# Altium PCB LMV324收发一体-20260920.PcbDoc
Units mil, origin at the board's own origin, x right, y up, seen from the top; angles counter-clockwise.
Board outline 358.27 x 1118.11 mil, 2 copper layers (Top, Bottom), stack 12.7 mil thick; 61 components, 38 nets, 157 pads, 62 vias.
Unrouted connection lines stored in the file: 1.
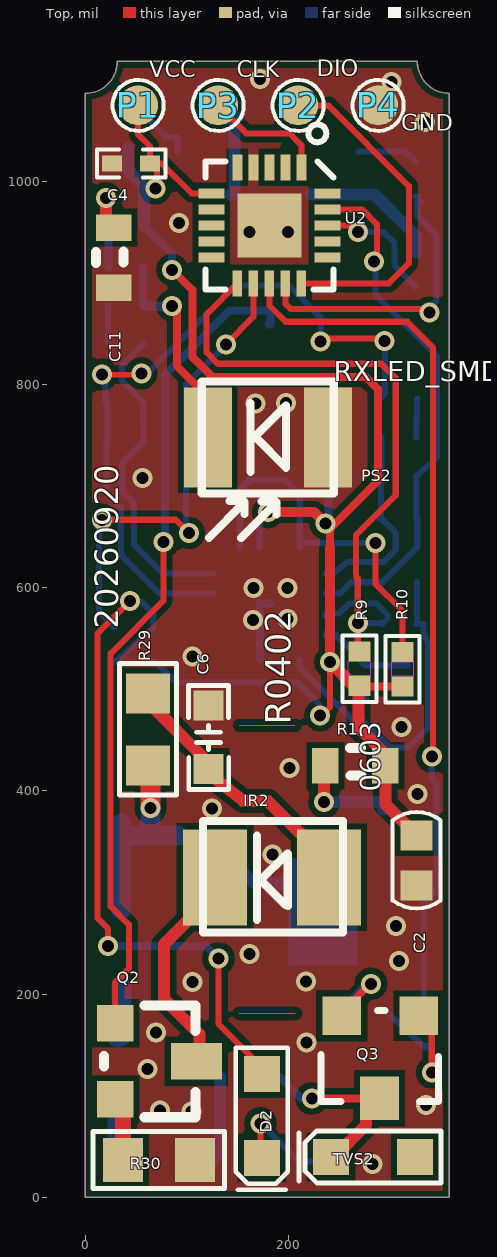
[diagram p0: Top view]
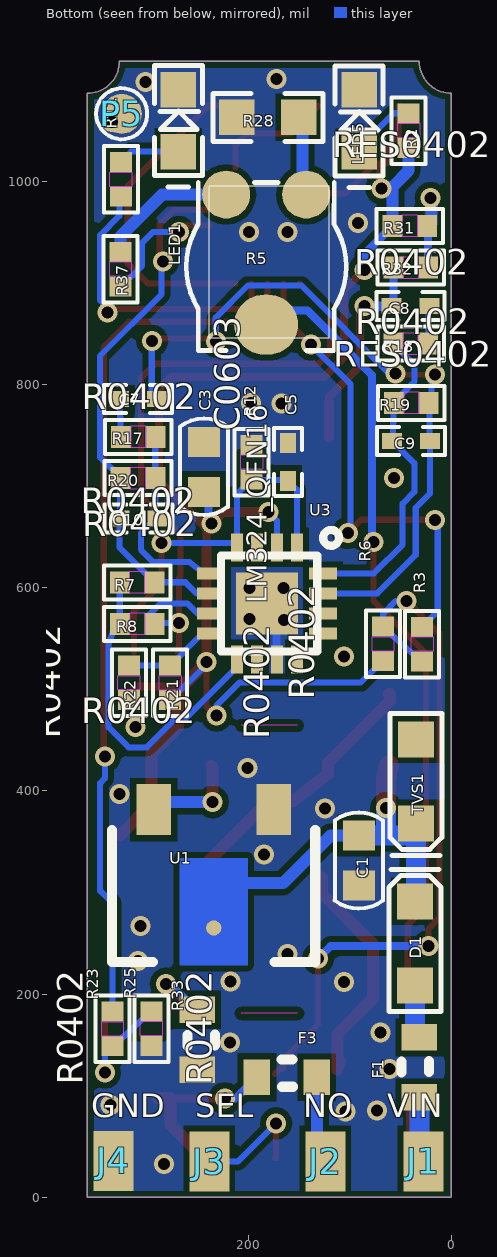
[diagram p1: Bottom view, seen from below]

## Layer stack, top to bottom
Solder Mask Top: solder mask 0.4, Solder Resist, Dk 3.5
Top: signal copper 1.35
Dielectric 1: dielectric 10, FR-4, Dk 4.3
Bottom: signal copper 1.35
Solder Mask Bottom: solder mask 0.4, Solder Resist, Dk 3.5

## Board outline
358.27,0 0,0 0,1086.61 ccw(c0,1118.11) 31.5,1118.11 326.77,1118.11 ccw(c358.27,1118.11) 358.27,1086.61

## Design rules (kind name [scope] priority, off if disabled: settings)
Clearance "Clearance - Default - DEFAULT- SMD" [IsVia vs IsSMTPin] p1: gap=6 ignorepadtopadclearanceinfootprint=FALSE
Clearance "Clearance - Default - DEFAULT - Via" [IsVia vs IsVia] p2: gap=6 ignorepadtopadclearanceinfootprint=FALSE
Clearance "Clearance - Default - DEFAULT - Net" [All] p3: gap=6 ignorepadtopadclearanceinfootprint=FALSE except(0: Arc-Hole Track-Hole SMDPad-Hole THPad-Hole Via-Hole Fill-Hole Poly-Hole Region-Hole Text-Hole; 10: Text-Text)
ComponentClearance "ComponentClearance - Default - DEFAULT" [All] p1: gap=6 collisioncheckmode=3 verticalgap=10 showdistances=FALSE
FanoutControl Fanout_Small [(CompPinCount < 5)] p3: bgadir=Out bgaviamode=Centered fanoutstyle=Auto fanoutdirection=OutThenIn viagrid=1 // Fanout_Small (Default Rule)
FanoutControl Fanout_SOIC [IsSOIC] p4: bgadir=Out bgaviamode=Centered fanoutstyle=Auto fanoutdirection=Alternating viagrid=1 // Fanout_SOIC (Default Rule)
HoleToHoleClearance "HoleToHoleClearance - Default - DEFAULT" [All] p1: gap=6 allowstackedmicrovias=TRUE
Length "Default Length" [All] p1: maxlimit=50000 minlimit=0
MaxMinImpedance "Default Impedance" [All] p1: minimum=50.00 maximum=150.0
ParallelSegment "Default Parallel Segment Adjasent" [All] p1: limit=1000 gap=200
ParallelSegment "Default Parallel Segment Same Layer" [All] p2: limit=1000 gap=200
PlaneConnect "Default PlaneConnect" [All] p1: planeconnectstyle=Direct reliefexpansion=20 reliefentries=4 reliefconductorwidth=15 reliefairgap=10
PolygonConnect "PolygonConnect - Default SMT" [IsSMTPin] p1: connectstyle=Direct reliefconductorwidth=10 reliefentries=4 polygonreliefangle="45 Angle" airgapwidth=10
PolygonConnect "PolygonConnect - Default Pad" [All] p2: connectstyle=Direct reliefconductorwidth=15 reliefentries=4 polygonreliefangle="45 Angle" airgapwidth=10
RoutingLayers "RoutingLayers - Default - DEFAULT" [All] p1: top layer_v5=TRUE bottom layer_v5=TRUE
RoutingPriority "RoutingPriority - Default - DEFAULT" [All] p1: routingpriority=3
RoutingTopology "Default Routing Topology" [All] p1: topology=Shortest
RoutingVias "RoutingVias - Default - DEFAULT" [All] p1: holewidth=11.81 width=19.68 viastyle="Through Hole" minholewidth=11.81 minwidth=19.68 maxholewidth=11.81 maxwidth=19.68
SMDToCorner "SMDToCorner - Default - DEFAULT" [All] p1: distance=60000
SolderMaskExpansion [All] p1: expansion=4 istentingtop=FALSE
Width "Default Width" [All] p1: maxlimit=6 minlimit=6 preferedwidth=6
22 further rules are at their usual default settings.

## Components (designator, comment, footprint, x,y, rotation, side; value= is the part's Value field where it differs from the comment)
C1 "C0603" C0603 91.13,331.55 r270 bottom
C2 "C0603" C0603 326.03,331.75 r270 top
C3 "C0603" C0603 243.66,719.03 r90 bottom
C4 "CC0402" CC0402 80.88,1032.85 r180 top
C5 "CAA0402" CAA0402 145.27,688.1 r90 bottom
C6 "0603C" 0603C 121.23,452.76 r270 top
C7 "CC0402" CC0402 344.14,770.3 r180 bottom
C8 "CC0402" CC0402 4.59,892.74 r0 bottom
C9 "CC0402" CC0402 75.44,729.23 r180 bottom
C10 "CC0402" CC0402 343.84,652.79 r180 bottom
C11 "0603" 0603 28.03,895.44 r180 top
D1 "WSOD-323" WSOD-323 35.8,250 r270 bottom
D2 "WSOD-323" WSOD-323 173.68,80.23 r90 top
F1 "0603" 0603 31.5,98.43 r0 bottom
F3 "0603" 0603 191.44,118.29 r90 bottom
IR2 "TXLED_SMD" TXLED_SMD 244.09,314.96 r270 top
J1 "FPAD_3C" FPAD_3C 27.56,35.43 r90 bottom
J2 "FPAD_3C" FPAD_3C 124.02,35.43 r90 bottom
J3 "FPAD_3C" FPAD_3C 238.19,35.43 r90 bottom
J4 "FPAD_3C" FPAD_3C 332.68,35.83 r90 bottom
LED1 "LED0603" LED0603 243.7,1004.33 r90 bottom
LED5 "LED0603" LED0603 65.75,1003.94 r90 bottom
P1 "TEST-POINT_D1.0" TEST-POINT_D1.0 51.97,1074.8 r0 top
P2 "TEST-POINT_D1.0" TEST-POINT_D1.0 209.45,1074.8 r0 top
P3 "TEST-POINT_D1.0" TEST-POINT_D1.0 130.71,1074.8 r0 top
P4 "TEST-POINT_D1.0" TEST-POINT_D1.0 288.19,1074.8 r0 top
P5 "TEST-POINT_D1.0" TEST-POINT_D1.0 324.41,1066.54 r180 bottom
PS2 "RXLED_SMD" RXLED_SMD 179.53,748.03 r180 top
Q2 "SOT23" SOT23 68.37,133.86 r270 top
Q3 "SOT23$2F$2" SOT23$2F$2 329.53,178.74 r0 top
R1 "0603" 0603 236.22,424.78 r90 top
R2 "R0402" R0402 42.1,1050 r90 bottom
R3 "R0402" R0402 28.73,544.6 r270 bottom
R5 "SMD" SMD 182.28,916.14 r0 bottom
R6 "R0402" R0402 67.25,544.87 r270 bottom
R7 "R0402" R0402 309.36,605.41 r0 bottom
R8 "R0402" R0402 309.17,564.38 r180 bottom
R9 "R0402" R0402 269.7,520.46 r270 top
R10 "R0402" R0402 312.18,519.91 r270 top
R11 "R0402" R0402 325.2,1001.97 r90 bottom
R12 "R0402" R0402 196.5,723.68 r90 bottom
R17 "R0402" R0402 308.05,748.43 r180 bottom
R18 "R0402" R0402 40.07,840.31 r0 bottom
R19 "R0402" R0402 39.34,782.03 r0 bottom
R20 "R0402" R0402 308.41,707.91 r0 bottom
R21 "R0402" R0402 276.73,506.35 r90 bottom
R22 "R0402" R0402 317.37,506.54 r270 bottom
R23 "R0402" R0402 333.46,165.75 r90 bottom
R25 "R0402" R0402 295.28,166.14 r270 bottom
R28 "R0603" R0603 150,1062.99 r0 bottom
R29 "R0805" R0805 61.42,425.2 r90 top
R30 "R0805" R0805 107.87,36.61 r180 top
R31 "RES0402" RES0402 40.86,956.15 r0 bottom
R32 "RES0402" RES0402 39.76,915.1 r180 bottom
R33 "0603" 0603 250.23,184.69 r180 bottom
R37 "RES0402" RES0402 325.71,913.63 r270 bottom
TVS1 "SOD-323" SOD-323 34.94,409.45 r90 bottom
TVS2 "SOD-323" SOD-323 283.07,39.76 r0 top
U1 "SOT89" SOT89 233.89,301.67 r0 bottom
U2 "MG32F003_QFN20" MG32F003_QFN20 181.1,956.69 r270 top
U3 "LM324_QFN16" LM324_QFN16 181.5,584.65 r270 bottom

## Footprints (in the part's own frame and the unit in brackets; to place one, negate y for a bottom-side part, rotate by r counter-clockwise, add the part's x,y. Pads: shape width x height; smd on the part's side, far side on the other; paste and mask are expansions set on the pad)
0603 [mil]
  rect 35x26 smd: 1(0,0) 2(0,-59)
  silkscreen extent -9,-36 18,-24
0603C [mm]
  rect 0.75x0.75 smd: 1(-0.791,-0.004) 2(0.791,0.004)
  round 0 all layers, no hole: $$$1(0,0)
  silkscreen extent -1.3,-0.5 1.3,0.5
C0603 [mm]
  rect 0.75x0.8 smd: 1(-0.625,0) 2(0.625,0)
  silkscreen extent -1.21,-0.6 1.21,0.6
CAA0402 [mm]
  rect 0.5x0.4 smd: 1(0.435,0.391) 2(1.385,0.391)
  silkscreen extent 0.06,0.04 1.76,0.74
CC0402 [mm]
  rect 0.5x0.4 smd: 1(0.435,0.391) 2(1.385,0.391)
  silkscreen extent 0.06,0.04 1.76,0.74
FPAD_3C [mm]
  rect 1.5x1 smd: 1(0,0)
LED0603 [mil]
  rect 35x35 smd: 1(25,25) 2(86.02,25)
  silkscreen extent -10,1 110,49
LM324_QFN16 [mm]
  rect 0.7x0.3 smd: 1(-1.4,0.75) 2(-1.4,0.25) 3(-1.4,-0.25) 4(-1.4,-0.75) 9(1.4,-0.75) 10(1.4,-0.25) 11(1.4,0.25) 12(1.4,0.75)
  rect 0.3x0.7 smd: 5(-0.75,-1.4) 6(-0.25,-1.4) 7(0.25,-1.4) 8(0.75,-1.4) 13(0.75,1.4) 14(0.25,1.4) 15(-0.25,1.4) 16(-0.75,1.4)
  rrect0% 1.55x1.55 smd: 17(0,0)
  silkscreen extent -1.84,-1.15 1.21,1.8
MG32F003_QFN20 [mm]
  rect 0.65x0.25 smd: 1(-1.45,0.8) 2(-1.45,0.4) 3(-1.45,0) 4(-1.45,-0.4) 5(-1.45,-0.8)
  rect 0.25x0.65 smd: 6(-0.8,-1.45) 7(-0.4,-1.45) 8(0,-1.45) 9(0.4,-1.45) 10(0.8,-1.45) 16(0.8,1.45) 17(0.4,1.45) 18(0,1.45) 19(-0.4,1.45) 20(-0.8,1.45)
  rect 0.65x0.24 smd: 11(1.45,-0.8) 12(1.45,-0.4) 13(1.45,0) 14(1.45,0.4) 15(1.45,0.8)
  rrect0% 1.6x1.6 smd: 21(0,0)
  silkscreen extent -2.52,-1.6 1.6,1.6
R0402 [mm]
  rect 0.5x0.55 smd: 1(-0.432,0) 2(0.432,0)
  Top keep-out region: -0.18,0.274 0.182,0.274 0.182,-0.273 -0.18,-0.273 -0.18,0.274
  silkscreen extent -0.83,-0.43 0.83,0.43
R0603 [mil]
  rect 35x35 smd: 1(0,0) 2(61.02,0)
  silkscreen extent -24,-24 85,24
R0805 [mm]
  rect 1x1.1 smd: 1(0,0) 2(1.8,0)
  silkscreen extent -0.74,-0.72 2.55,0.71
RES0402 [mm]
  rect 0.5x0.55 smd: 1(-0.432,0) 2(0.432,0)
  Top keep-out region: -0.18,0.274 0.182,0.274 0.182,-0.273 -0.18,-0.273 -0.18,0.274
  silkscreen extent -0.83,-0.43 0.83,0.43
RXLED_SMD [mm]
  rect 1.2x2.5 smd: 1(-1.5,0) 2(1.5,0)
  silkscreen extent -1.65,-1.4 1.65,2.52
SMD [mm]
  round 1.2 smd: 1(-1,-1.8) 3(1,-1.8)
  oval 1.6x1.5 smd: 2(0,1.45)
  round 0 all layers, no hole: $$$1(0,0)
  silkscreen extent -2,-2.1 2,2.1
SOD-323 [mm]
  round 0 all layers, no hole: 1(0,0)
  rect 0.9x0.9 smd: 2(-1.05,0) 3(1.05,0)
  silkscreen extent -1.85,-0.65 1.7,0.65
SOT23 [mil]
  rect 36x36 smd: 1(-37.5,-39) 2(37.5,-39)
  rect 36x50 smd: 3(0,41)
  silkscreen extent -55,-50 55,40
SOT23$2F$2 [mil]
  rect 38x38 smd: 1(-1.5,0) 2(-77.2,0)
  rect 38x43 smd: 3(-40,-81.1)
  silkscreen extent -98,-84 18,5
SOT89 [mil]
  rect 34x50 smd: 1(-59,-80) 3(59,-80)
  round 15 smd: 2(0,36.5)
  Top region: -17,-31.89 -17,-32 -33.5,-32 -33.5,73 33.5,73 33.5,-32 17,-32 17,-31.89 -17,-31.89
  silkscreen extent -100,-60 100,70
TEST-POINT_D1.0 [mm]
  round 1 smd: 1(0,0)
  silkscreen extent -0.64,-0.64 0.64,0.64
TXLED_SMD [mm]
  rect 2.4x1.6 smd: 1(0,-0.11) 2(0,-2.96)
  silkscreen extent -1.41,-3.26 1.38,0.24
WSOD-323 [mm]
  rect 0.9x0.9 smd: 1(1.05,0) 2(-1.05,0)
  round 0 all layers, no hole: $$$1(0,0)
  silkscreen extent -1.85,-0.65 1.7,0.65

## Via types
v1: diameter 19.68, hole 11.81, Top to Bottom, 62 vias

## Nets (pads, with @x,y where several pads share a name; then routed paths per layer and width w, separated by ;. In a path a pad name is that pad's centre, name@x,y a point inside that pad or via, vN(x,y) a via of type N, cw(c..) or ccw(c..) an arc to the next point about the centre after c; other vN are vias at no path point)
$$$1: C8.1 R18.1 | length 38.4
  Bottom w6: C8.1 22.4,877.34 22.4,840.31 R18.1
$$$2: C7.1 R17.1 | length 38.9
  Bottom w6: R17.1 325.74,748.43 325.74,768.25 326.32,768.83 326.32,785.71 C7.1
$$$3: R5.3 R37.1 | length 136.4
  Bottom w11.81: R5.3 284.65,987.01 325.71,945.94 R37.1
$$$7: Q2.2 R30.2 | length 62.9
  Top w15.75: Q2.2 37.01,88.72 R30.2
$$$9: IR2.2 Q2.3 | length 232.7
  Top w11.81: Q2.3 112.2,125.98 112.2,160.63 77.17,195.67 77.17,248.82 127.56,299.21 IR2.2
$$$12: Q3.1 R23.1 R25.1 | length 156.8
  Top w6: Q3.1 340.94,178.74 v1(340.94,122.83)
  Bottom w6: R25.1 295.66,183.14 334.4,147.54 R23.1 340.94,148.75 v1(340.94,122.83)
$$$14: F3.1 Q3.3 TVS2.2 | length 233.3
  Top w6: TVS2.2 TVS2.2@246.26,39.76 ; Q3.3@273.53,79.14 273.53,97.64 Q3.3
  Top w7.87: v1(222.83,97.24) 289.53,97.24 Q3.3
  Top w11.81: TVS2.2 244.67,39.76 276.43,71.53 276.43,97.64 Q3.3
  Bottom w7.87: F3.1 212.49,97.24 v1(222.83,97.24)
$$$18: LED5.1 R2.2 | length 74
  Bottom w6: R2.2 56.69,1067 78.35,1045.35 78.35,1043.44 90.75,1043.44 LED5.1
$$$3960: Q2.1 R5.2 | length 828.4
  Top w6: Q2.1 29.37,211.65 42.91,225.2 42.91,268.3 24.8,286.41 24.8,535.04 76.77,587.01 v1(76.77,644.88)
  Bottom w7.87: v1(76.77,644.88) 78.35,640.16 78.35,809.45 141.73,872.83 182.28,872.83 R5.2 R5.2@180.31,859.06
$$$4871: D1.1 F1.2 | length 54.3
  Bottom w19.68: F1.2 35.8,158.97 D1.1
$$$4957: LED1.1 R11.2 | length 62.7
  Bottom w6: LED1.1 315.16,1029.33 325.98,1018.5 R11.2
$$$12813: C11.2 R31.1 R32.2 | length 109.8
  Top w11.81: v1(20.47,983.46) 20.47,954.44 C11.2
  Bottom w7.87: R32.2 22.76,956.15 R31.1
  Bottom w11.81: v1(20.47,983.46) 19.69,983.92 19.69,958.58 R31.1
$$$30448: R5.1 R28.1 | length 83.1
  Bottom w11.81: R5.1 146.55,987.01 146.55,1062.99 R28.1
$$$30618: Q3.2 R33.1 | length 86.6
  Top w7.87: Q3.2 250.79,180.28 250.79,180.68 280.34,210.24 v1(281.1,210.24)
  Bottom w6: R33.1 275.77,210.24 v1(281.1,210.24)
$$$31476: R1.1 U1.3 | length 101.5
  Top w11.81: v1(235.04,388.98) 235.04,423.6 R1.1
  Bottom w11.81: v1(235.04,388.98) 292.89,388.98 U1.3
$$$31637: C6.2 IR2.1 R29.2 | length 275.2
  Top w11.81: R29.2 60.63,495.28 60.63,488.58 121.38,427.83 C6.2@121.38,418.76 ; C6.2 C6.2@121.38,418.76 ; IR2.1 239.76,330.01 179.62,390.16 155.37,390.16 121.38,416.85 C6.2@121.38,418.76
$$$31695: D2.1 R3.2 R6.1 | length 698.5
  Top w6: v1(22.44,247.24) 22.44,264.22 11.81,275.24 11.81,554.72 v1(44.09,587.01) ; v1(131.1,235.04) 131.1,170.47 165.16,136.42 165.16,126.77 168.47,126.77 D2.1
  Bottom w6: R3.2 28.95,527.6 28.95,526.76 67.02,561.03 67.02,561.87 R6.1 67.25,574.43 54.67,587.01 v1(44.09,587.01)
  Bottom w7.87: v1(22.44,247.24) 118.9,247.24 v1(131.1,235.04)
GND: C1.2 C2.2 C3.2 C4.2 C5.2 C6.1 C11.1 J4.1 LED1.2 LED5.2 P4.1 P5.1 PS2.1 R12.2 R22.2 R25.2 R28.2 R30.1 R33.2 TVS1.1 TVS2.1 U1.1 U2.4 U2.21 U3.11 U3.17 | length 64.6
  Bottom w7.87: U3.11 172.05,539.37 172.05,584.65 U3.17
  other v1: 282.68,32.68 104.33,84.65 73.23,85.43 335.43,90.94 61.02,126.38 217.72,152.36 69.69,162.2 105.51,212.2 217.32,212.6 308.66,232.68 161.42,239.76 305.91,267.32 184.25,337.4 124.41,382.68 326.77,397.24 200.79,422.83 311.02,462.99 105.51,532.28 164.96,568.11 198.82,569.29 165.35,599.61 198.82,599.61 56.3,708.27 167.32,781.5 197.24,781.89 199.21,950 161.42,950.39 92.13,959.06 334.25,1058.27 301.18,1098.03 172.05,1100.79
IN1-: C9.1 R18.2 R19.2 U3.16 | length 320.5
  Bottom w6: R18.2 57.07,839.95 36.22,819.1 36.22,803.14 56.34,783.01 R19.2 56.97,782.03 56.97,762.12 57.28,761.81 57.37,761.81 57.37,744.63 C9.1 36.35,722.69 36.35,694.43 48.03,682.75 48.03,642.52 76.38,614.17 U3.16
IN2+: C5.1 R10.1 R12.1 U3.1 U3.4 | length 376.3
  Top w6: v1(285.43,644.09) 285.43,603.88 312.18,577.13 R10.1
  Bottom w6: U3.1 151.97,696.54 C5.1 160.67,705.96 196.5,705.96 R12.1 211.02,692.16 U3.4 211.02,644.09 v1(285.43,644.09)
IN2-: C10.2 R17.2 R20.1 U3.5 | length 199
  Bottom w6: U3.5 243.63,614.17 257.96,625.24 293.22,625.24 305.5,637.52 305.5,653.96 291.27,668.19 C10.2 291.18,668.19 291.18,707.91 R20.1 291.41,748.43 R17.2
IN3+: R7.2 R8.1 U3.9 | length 325.6
  Bottom w6: U3.9 211.02,521.65 262.2,470.47 272.05,470.47 299.61,442.91 317.72,442.91 337.4,462.6 337.4,544.49 333.01,556.55 333.01,564.38 R8.1 326.36,564.38 R7.2
IN3-: R21.2 R22.1 U3.8 | length 118.3
  Bottom w6: U3.8@239.37,552.36 236.61,552.36 U3.8 ; U3.8@244.56,555.12 U3.8 ; R21.2@268.91,530.19 275.59,523.35 R21.2 ; R22.1 276.73,523.54 R21.2 ; U3.8 244.96,555.12 R21.2
IO_OUTPUT_NC: R3.1 U2.12 | length 482.1
  Top w6: v1(16.14,666.93) 88.98,666.93 v1(101.97,653.94) ; v1(138.19,839.37) 165.35,866.54 U2.12
  Bottom w6: v1(16.14,666.93) 16.73,666.34 13.39,662.99 13.39,576.94 R3.1 R3.1@26.94,561.6 ; v1(101.97,653.94) 99.21,653.94 99.21,800.39 v1(138.19,839.37)
IO_OUTPUT_NO: R23.2 U2.13 | length 864.1
  Top w6: U2.13 181.1,877.81 197.1,861.81 316.93,861.81 342.13,836.61 342.13,433.86 v1(340.94,433.86)
  Bottom w6: R23.2 333.46,289.44 345.67,301.64 345.67,407.64 340.94,412.37 v1(340.94,433.86) 341.34,433.46 v1@341.34,431.89
OUT1: C7.2 C9.2 R19.1 U3.15 | length 717.6
  Top w6: v1(16.14,809.84) 19.69,809.45 55.13,809.81 v1(55.12,811.02) ; v1(231.5,842.52) 231.5,845.28 294.49,845.28 v1(294.49,842.91)
  Bottom w6: v1(16.14,809.84) 19.69,809.45 19.69,782.03 R19.1 21.62,782.03 21.62,744.63 C9.2 20.9,692.91 35.04,678.77 35.04,632.28 72.83,594.49 U3.15 ; v1(55.12,811.02) 57.87,809.84 58.99,808.72 147.91,897.64 200.16,897.64 231.89,865.9 231.89,842.52 v1(231.5,842.52) ; C7.2@288.62,785.71 C7.2 294.88,790.99 294.88,830.71 v1(294.49,842.91)
OUT2: C10.1 R7.1 R20.2 U2.19 U3.6 | length 521.6
  Top w6: U2.19 272.32,972.44 287.01,957.75 287.01,922.44 285.43,922.44 283.68,922.04 v1(283.86,921.26)
  Bottom w6: U3.6 250.89,594.49 261.81,605.41 R7.1 326.7,639.75 C10.1 326.05,668.19 326.05,707.91 R20.2 325.41,709.58 342.11,724.61 345.84,728.34 345.84,828.17 285.43,888.58 285.43,921.26 v1(283.86,921.26)
OUT3: R8.2 R9.1 U2.11 U3.7 | length 673.5
  Top w6: U2.11 119.29,869.29 119.29,831.62 130.44,820.47 291.34,820.47 305.51,806.3 305.51,690.94 266.54,651.97 266.54,611.06 268.11,609.48 v1(268.11,565.35) 268.11,537.46 R9.1
  Bottom w6: U3.7@236.61,571.98 U3.7 250,574.8 259.84,584.65 286.22,584.65 297.87,573 297.87,570.08 R8.2 292.17,565.35 v1(268.11,565.35)
OUT_NPN_NO: F3.2 J2.1 | length 86.3
  Bottom w11.81: J2.1 132.44,43.86 F3.2
PWM_OUT: R37.2 U2.18 | length 125.5
  Top w6: U2.18 261.42,956.69 v1(268.11,950)
  Bottom w6: v1(268.11,950) 293.7,950 304.33,939.37 304.33,917.03 324.73,896.63 R37.2
RED: R11.1 U2.14 | length 314
  Top w6: U2.14 196.85,879.54 201.98,874.41 338.58,874.41 v1(338.58,870.87)
  Bottom w6: R11.1@331.1,979.06 R11.1 326.77,984.97 326.77,966.04 345.67,947.15 345.67,882.8 331.83,868.96 v1(338.58,870.87)
SEL: D2.2 J3.1 | length 116.4
  Top w6: v1(172.44,72.83) 172.44,38.89 D2.2
  Bottom w6: v1(172.44,72.83) 209.84,35.43 J3.1
SIGN: C8.2 PS2.2 R32.1 | length 249.6
  Top w7.87: v1(85.43,877.56) 90.16,872.83 90.16,818.11 120.47,787.8 PS2.2
  Top w9.84: v1(85.43,877.56) v1@88.58,876.77 ; PS2.2 PS2.2@120.47,783.07
  Bottom w7.87: R32.1 56.76,877.34 C8.2
  Bottom w9.84: C8.2 62.77,877.34 73.23,876.77 85.43,876.77 v1(85.43,877.56)
SWCLK: P3.1 U2.1 | length 119.9
  Top w6: P3.1 158.27,1047.24 200.93,1047.24 212.6,1035.57 U2.1
SWDIO: P2.1 U2.15 | length 332
  Top w6: P2.1 238.98,1074.8 318.5,995.28 318.5,919.29 298.82,899.61 U2.15
VC: C1.1 D1.2 R29.1 TVS1.2 U1.2 | length 420.5
  Top w19.68: R29.1 64.17,412.6 v1(64.17,383.07)
  Bottom w11.81: D1.2@34.94,283.26 D1.2 ; C1.1 118.79,356.15 165.74,309.2 206.3,309.2 233.89,281.61 U1.2
  Bottom w19.68: D1.2@34.94,283.26 TVS1.2 34.94,356.15 64.17,356.15 ; v1(64.17,383.07) 64.17,356.15 ; C1.1 64.17,356.15
VCC: C2.1 C3.1 C4.1 P1.1 R1.2 R2.1 R6.2 R9.2 R10.2 R21.1 R31.2 U2.6 U3.2 | length 1613.6
  Top w6: P1.1 51.97,1046.08 63.73,1034.32 C4.1 ; v1(68.9,992.91) 70.58,992.91 70.58,1017.44 C4.1 ; U2.6 104.45,988.19 75.2,1017.44 C4.1 ; v1(231.1,474.41) 229.13,471.65 229.53,471.26 240.94,482.68 v1(240.94,526.77) ; v1@234.65,661.81 v1(236.22,663.39) v1@240.94,658.66 ; R9.2@269.7,502.91 R9.2
  Top w7.87: v1(85.43,912.99) 105.51,892.91 105.51,827.1 125.14,807.48 275.98,807.48 287.8,795.67 287.8,705.12 240.94,658.27 240.94,638.98 ; R9.2@269.7,502.91 R10.2
  Top w9.84: v1(179.92,674.41) 225.2,674.41 v1(236.22,663.39) ; v1(240.94,526.77) 240.94,638.98 ; v1@240.94,658.27 v1@240.94,658.66
  Top w11.81: v1(240.94,526.77) 265.35,502.36 R9.2@269.7,502.36 ; R9.2 R9.2@269.7,502.36 ; C2.1 295.22,387.17 R1.2 295.22,436.22 268.9,462.54 268.9,464.96 268.9,501.56 R9.2@269.7,502.36
  Bottom w6: v1@62.2,992.91 v1(68.9,992.91) ; R6.2 68.23,527.87 89.41,506.69 208.66,506.69 231.1,484.25 231.1,472.44 228.74,470.08 229.13,471.65 v1(231.1,474.41) ; U3.2 171.65,666.14 v1(179.92,674.41) ; v1(240.94,526.77) 240.94,524.9 276.5,489.35 R21.1
  Bottom w7.87: R31.2 85.43,928.58 v1(85.43,912.99) ; v1(236.22,663.39) 239.23,663.39 239.23,694.42 C3.1
  Bottom w9.84: R31.2@57.86,955.41 R31.2
  Bottom w11.81: R2.1 42.1,1010.63 57.86,994.87 57.86,992.91 ; R31.2 57.86,992.91 ; v1@62.2,992.91 57.86,992.91
VIN: F1.1 J1.1 | length 64.6
  Bottom w19.68: J1.1 31.5,39.37 F1.1
pads on no net: C6.$$$1 D1.$$$1 D2.$$$1 R5.$$$1 TVS1.3 TVS2.3 U2.2 U2.3 U2.5 U2.7 U2.8 U2.9 U2.10 U2.16 U2.17 U2.20 U3.3 U3.10 U3.12 U3.13 U3.14

## Polygon pours and split planes (outlines as drawn)
GND on Bottom "Bottom-GND" (solid, remove dead copper, pour order 0): -154.72,1153.94 501.18,1153.94 501.18,-57.48 -154.72,-57.48
GND on Top "Top-GND" (solid, remove dead copper, pour order 1): -120.08,1161.81 535.83,1161.81 535.83,-49.61 -120.08,-49.61

## Keep-outs
Keep-Out Layer:
  lines w1: 151.57,181.1 206.69,181.1 ; 151.57,464.57 206.69,464.57 ; 0,0 0,1086.61 ccw(c0,1118.11) 31.5,1118.11 326.77,1118.11 ccw(c358.27,1118.11) 358.27,1086.61 358.27,0 0,0

## Other copper
Multi-Layer:
  circle w1: c15079.13,6090.55 r0.8
  circle w1: c12879.13,6890.55 r0.8
  circle w1: c12879.13,6883.35 r0.8
  circle w1: c15079.13,6083.35 r0.8
  lines w1: 12874.58,6877.75 12874.58,6905.35 ccw(c12874.58,6906.15) 12875.38,6906.15 12882.88,6906.15 ccw(c12883.68,6906.15) 12883.68,6905.35 12883.68,6877.75 12874.58,6877.75 ; 12877.38,6885.35 12877.38,6888.15 12880.88,6888.15 12880.88,6885.35 12877.38,6885.35 ; 15074.58,6077.75 15074.58,6105.35 ccw(c15074.58,6106.15) 15075.38,6106.15 15082.88,6106.15 ccw(c15083.68,6106.15) 15083.68,6105.35 15083.68,6077.75 15074.58,6077.75 ; 15077.38,6085.35 15077.38,6088.15 15080.88,6088.15 15080.88,6085.35 15077.38,6085.35

## Silkscreen, mask and mechanical layers (free items; w line width, h text height)
Silkscreen Top:
  text "CLK" at 149.21,1097.24 h27.56
  text "DIO" at 227.95,1098.03 h27.56
  text "VCC" at 62.99,1096.85 h27.56
  text "GND" at 311.02,1044.49 h27.56
  text "20260920" at 40.16,559.84 h39.37 r90
Silkscreen Bottom:
  lines w1: 120.08,845.67 238.19,845.67 238.19,995.28 120.08,995.28 120.08,845.67
  text "VIN" at 62.99,70.87 h39.37
  text "NO" at 145.67,70.87 h39.37
  text "SEL" at 251.97,70.87 h39.37
  text "GND" at 354.33,70.87 h39.37
Drill Drawing:
  lines w1: 337.36,789.02 337.39,789.02 ; 257.74,1118.34 257.77,1118.34
  lines w10: 307.74,1118.34 750,1118.34 ; 387.36,789.02 750,789.02 ; 700,639.02 700,789.02 ; 700,1268.34 700,1118.34 ; 700,789.02 675,689.02 725,689.02 700,789.02 ; 700,1118.34 725,1218.34 675,1218.34 700,1118.34
  text "8.4mm" at 408.64,1230.84 h50